# Altium PCB REO_channel.PcbDoc
Units mil, origin at the board's own origin, x right, y up, seen from the top; angles counter-clockwise.
Board outline 6000 x 4000 mil, 2 copper layers (Top Layer, Bottom Layer); 21 components, 17 nets, 94 pads, 0 vias.
Unrouted connection lines stored in the file: 23.
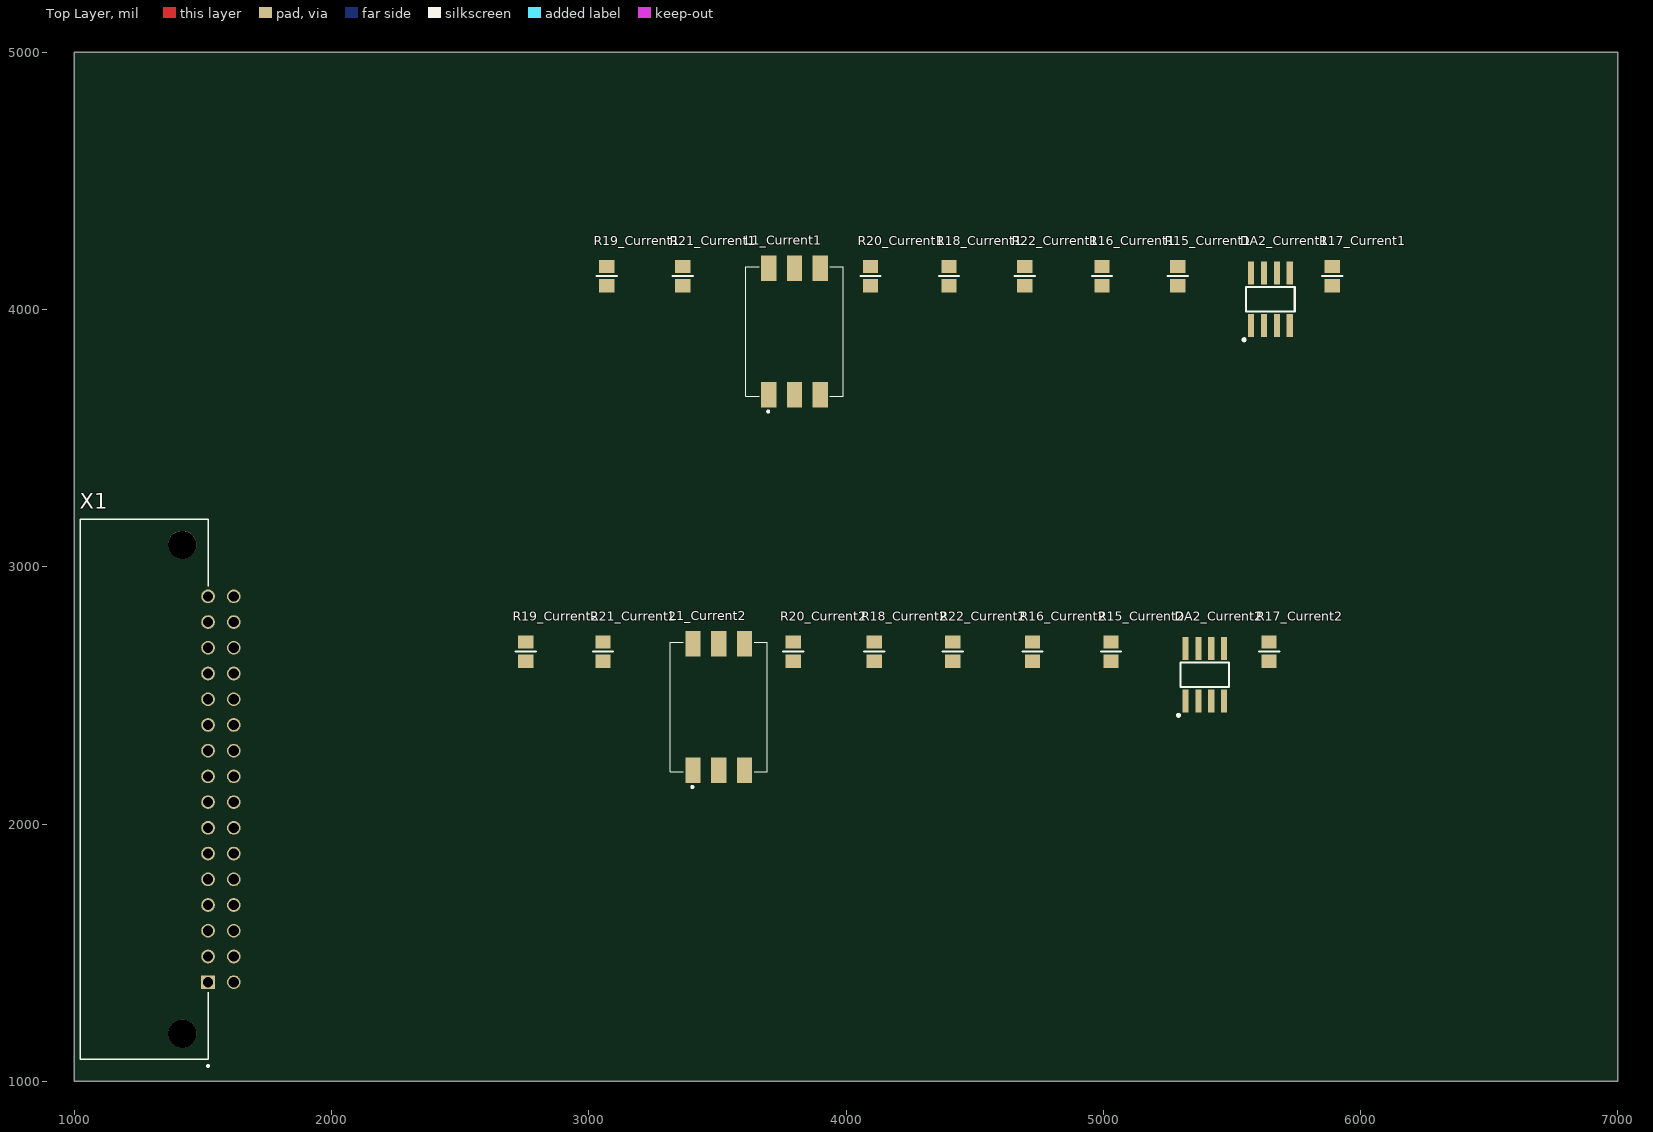
[diagram p0: Top Layer view]
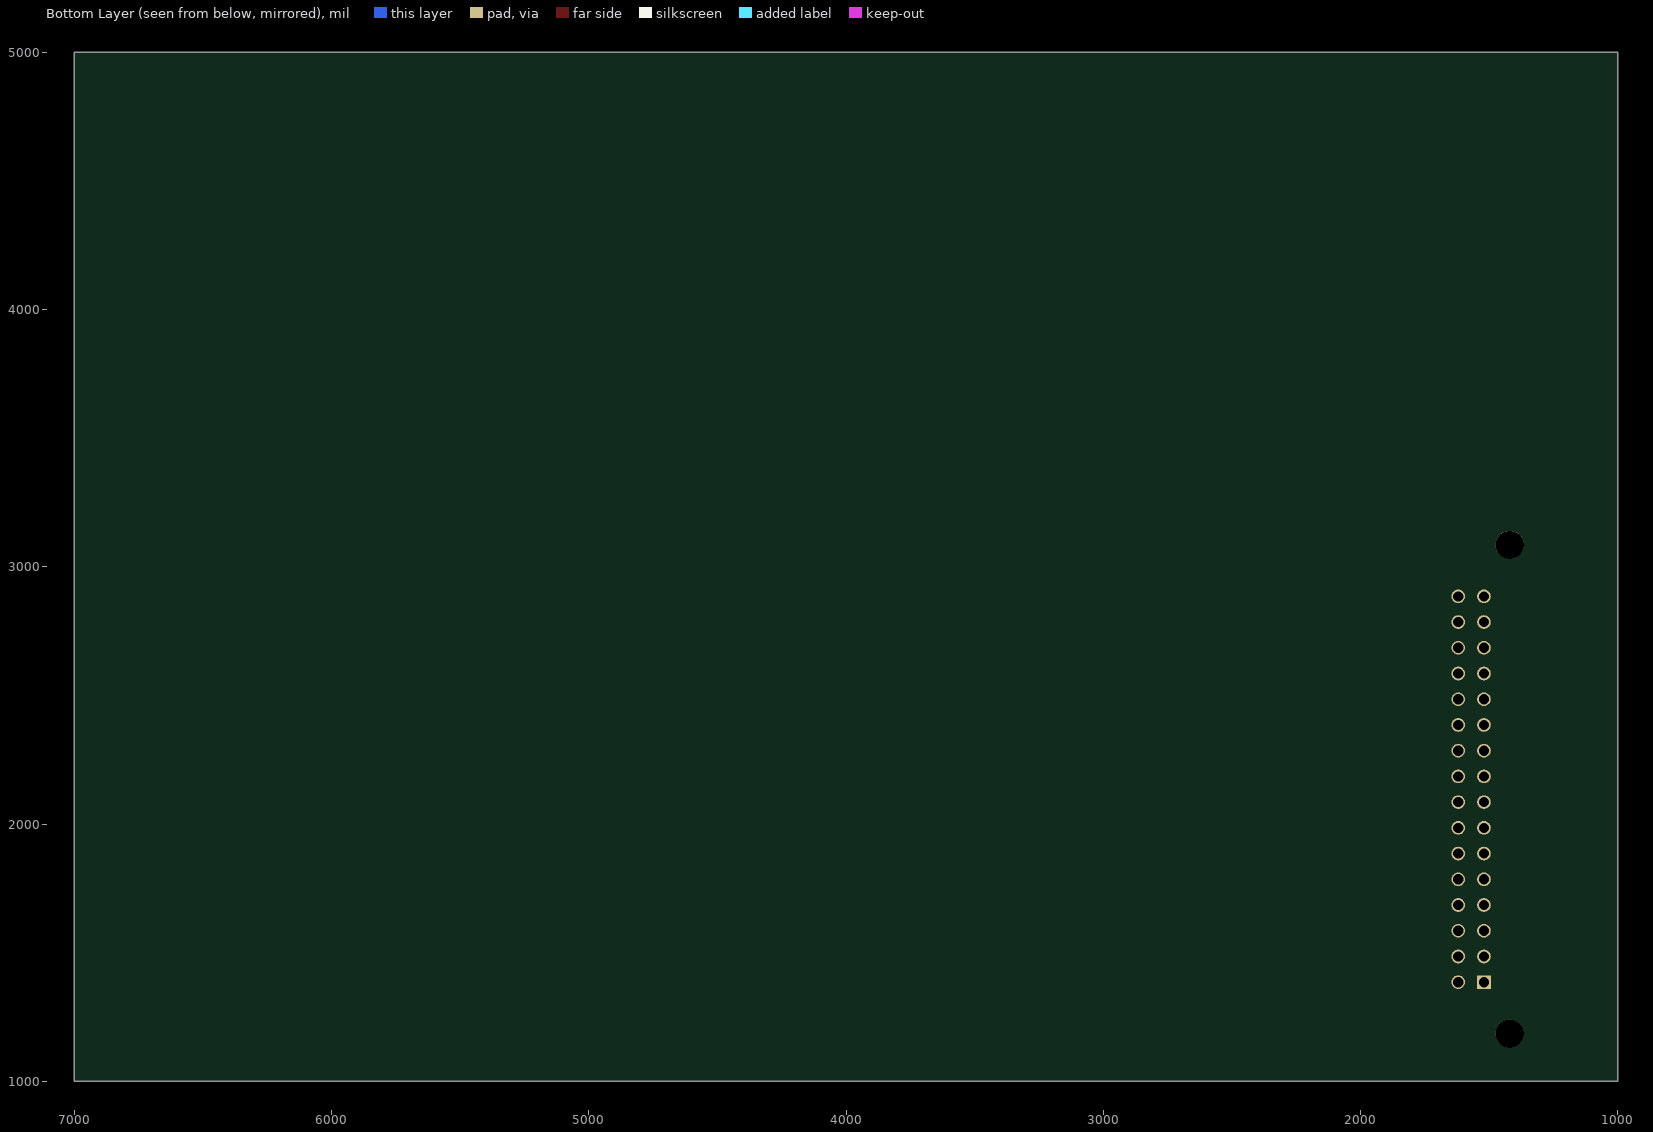
[diagram p1: Bottom Layer view, seen from below]

## Layer stack, top to bottom
Top Solder: solder mask 0.4, Solder Resist, Dk 3.5
Top Layer: signal copper 1.4
Dielectric 1: dielectric 12.6, FR-4, Dk 4.8
Bottom Layer: signal copper 1.4
Bottom Solder: solder mask 0.4, Solder Resist, Dk 3.5

## Board outline
1000,1000 7000,1000 7000,5000 1000,5000

## Design rules (kind name [scope] priority, off if disabled: settings)
Clearance [All] p1: gap=10 ignorepadtopadclearanceinfootprint=FALSE
PolygonConnect [All] p1: connectstyle=Relief reliefconductorwidth=10 reliefentries=4 polygonreliefangle="90 Angle" airgapwidth=10
RoutingVias [All] p1: holewidth=28 width=50 viastyle="Through Hole" minholewidth=28 minwidth=50 maxholewidth=28 maxwidth=50
SolderMaskExpansion [All] p1: expansion=4 istentingtop=FALSE
Width [All] p1: maxlimit=10 minlimit=10 preferedwidth=10
30 further rules are at their usual default settings.

## Classes and differential pairs
channel class Current: Current1 Current2
component class Current2: DA2_Current2 L1_Current2 R15_Current2 R16_Current2 R17_Current2 R18_Current2 R19_Current2 R20_Current2 R21_Current2 R22_Current2
component class Current1: DA2_Current1 L1_Current1 R15_Current1 R16_Current1 R17_Current1 R18_Current1 R19_Current1 R20_Current1 R21_Current1 R22_Current1
component class REO_channel: X1

## Components (designator, comment, footprint, x,y, rotation, side; value= is the part's Value field where it differs from the comment)
DA2_Current1 "AD8028" "IC: SOIC 8" 5650,4040 r90 top (schematic designator DA2)
DA2_Current2 "AD8028" "IC: SOIC 8" 5395,2580 r90 top (schematic designator DA2)
L1_Current1 "SM-LP-5001" "IND: SM-LP-5001E" 3800,3905 r90 top (schematic designator L1)
L1_Current2 "SM-LP-5001" "IND: SM-LP-5001E" 3505,2445 r90 top (schematic designator L1)
R15_Current1 "2k ±1% 0805" "RES: SMD 0805 MD IPC 782" 5290,4130 r90 top (schematic designator R15)
R15_Current2 "2k ±1% 0805" "RES: SMD 0805 MD IPC 782" 5030,2670 r90 top (schematic designator R15)
R16_Current1 "2k ±1% 0805" "RES: SMD 0805 MD IPC 782" 4995,4130 r90 top (schematic designator R16)
R16_Current2 "2k ±1% 0805" "RES: SMD 0805 MD IPC 782" 4725,2670 r90 top (schematic designator R16)
R17_Current1 "2k ±1% 0805" "RES: SMD 0805 MD IPC 782" 5890,4130 r90 top (schematic designator R17)
R17_Current2 "2k ±1% 0805" "RES: SMD 0805 MD IPC 782" 5645,2670 r90 top (schematic designator R17)
R18_Current1 "1k ±1% 0805" "RES: SMD 0805 MD IPC 782" 4400,4130 r90 top (schematic designator R18)
R18_Current2 "1k ±1% 0805" "RES: SMD 0805 MD IPC 782" 4110,2670 r90 top (schematic designator R18)
R19_Current1 "0 ±1% 0805" "RES: SMD 0805 MD IPC 782" 3070,4130 r90 top (schematic designator R19)
R19_Current2 "0 ±1% 0805" "RES: SMD 0805 MD IPC 782" 2755,2670 r90 top (schematic designator R19)
R20_Current1 "0 ±1% 0805" "RES: SMD 0805 MD IPC 782" 4095,4130 r90 top (schematic designator R20)
R20_Current2 "0 ±1% 0805" "RES: SMD 0805 MD IPC 782" 3795,2670 r90 top (schematic designator R20)
R21_Current1 "0 ±1% 0805" "RES: SMD 0805 MD IPC 782" 3365,4130 r90 top (schematic designator R21)
R21_Current2 "0 ±1% 0805" "RES: SMD 0805 MD IPC 782" 3055,2670 r90 top (schematic designator R21)
R22_Current1 "1k ±1% 0805" "RES: SMD 0805 MD IPC 782" 4695,4130 r90 top (schematic designator R22)
R22_Current2 "1k ±1% 0805" "RES: SMD 0805 MD IPC 782" 4415,2670 r90 top (schematic designator R22)
X1 "DIN32MR" "DIN 2x16 32MR" 1570,2135 r270 top

## Footprints (in the part's own frame and the unit in brackets; to place one, negate y for a bottom-side part, rotate by r counter-clockwise, add the part's x,y. Pads: shape width x height; smd on the part's side, far side on the other; paste and mask are expansions set on the pad)
"DIN 2x16 32MR" [mm]
  rect 1.35x1.35 / inner round 1.35 / far side rect 1.35x1.35 hole 1: 1(19.05,-1.27)
  round 1.35 hole 1: 2(16.51,-1.27) 3(13.97,-1.27) 4(11.43,-1.27) 5(8.89,-1.27) 6(6.35,-1.27) 7(3.81,-1.27) 8(1.27,-1.27) 9(-1.27,-1.27) 10(-3.81,-1.27) 11(-6.35,-1.27) 12(-8.89,-1.27) 13(-11.43,-1.27) 14(-13.97,-1.27) 15(-16.51,-1.27) 16(-19.05,-1.27) 17(19.05,1.27) 18(16.51,1.27) 19(13.97,1.27) 20(11.43,1.27) 21(8.89,1.27) 22(6.35,1.27) 23(3.81,1.27) 24(1.27,1.27) 25(-1.27,1.27) 26(-3.81,1.27) 27(-6.35,1.27) 28(-8.89,1.27) 29(-11.43,1.27) 30(-13.97,1.27) 31(-16.51,1.27) 32(-19.05,1.27)
  round 2.79 hole 2.79 unplated: ""(-24.13,-3.81) ""(24.13,-3.81)
  silkscreen extent -26.67,-13.89 27.42,-1.17, body extent -26.6,-13.84 26.6,1.66, height 9.6
"IC: SOIC 8" [mm]
  rect 2.25x0.6 smd: 1(-2.6,1.905) 2(-2.6,0.635) 3(-2.6,-0.635) 4(-2.6,-1.905) 5(2.6,-1.905) 6(2.6,-0.635) 7(2.6,0.635) 8(2.6,1.905)
  silkscreen extent -4.1,-2.4 1.2,2.7, body extent -3.05,-2.45 2.95,2.45, height 1.75
"IND: SM-LP-5001E" [mm]
  rect 2.5x1.5 smd: 1(-6,2.54) 2(-6,0) 3(-6,-2.54) 4(6.5,-2.54) 5(6.5,0) 6(6.5,2.54)
  silkscreen extent -7.75,-4.8 6.65,4.8, body extent -6.62,-4.55 7.38,4.8, height 7.38
"RES: SMD 0805 MD IPC 782" [mm]
  rect 1.3x1.5 smd: 1(-0.95,0) 2(0.95,0)
  silkscreen extent 0,-1 0,1, body extent -1.4,-0.62 1.4,0.63, height 0.8

## Part data
DA2_Current1 DA2_Current2: library part AD8028_part
X1: library part "DIN 2x16 32MR"
R15_Current1 R15_Current2 R16_Current1 R16_Current2 R17_Current1 R17_Current2: Code=6094352561, Name="Резистор 2k±1%  0805"
R18_Current1 R18_Current2 R22_Current1 R22_Current2: Code=6027158691, Name="Резистор RC0805FR-071KL, Yageo"
R19_Current1 R19_Current2 R20_Current1 R20_Current2 R21_Current1 R21_Current2: Code=6094342239, Name="Резистор 0R ±1% 0805"

## Nets (pads, with @x,y where several pads share a name; then routed paths per layer and width w, separated by ;. In a path a pad name is that pad's centre, name@x,y a point inside that pad or via, vN(x,y) a via of type N, cw(c..) or ccw(c..) an arc to the next point about the centre after c; other vN are vias at no path point)
GNDA: R16_Current1.2 R16_Current2.2 R19_Current1.1 R19_Current2.1
NetDA2_Current1_1: DA2_Current1.1 R17_Current1.1 R22_Current1.1
NetDA2_Current1_2: DA2_Current1.2 R15_Current1.1 R17_Current1.2
NetDA2_Current1_3: DA2_Current1.3 R16_Current1.1 R18_Current1.2
NetDA2_Current2_1: DA2_Current2.1 R17_Current2.1 R22_Current2.1
NetDA2_Current2_2: DA2_Current2.2 R15_Current2.1 R17_Current2.2
NetDA2_Current2_3: DA2_Current2.3 R16_Current2.1 R18_Current2.2
NetL1_Current1_3: L1_Current1.3 R19_Current1.2
NetL1_Current1_4: L1_Current1.4 R20_Current1.1
NetL1_Current1_6: L1_Current1.6 R21_Current1.1
NetL1_Current2_3: L1_Current2.3 R19_Current2.2
NetL1_Current2_4: L1_Current2.4 R20_Current2.1
NetL1_Current2_6: L1_Current2.6 R21_Current2.1
NetR15_Current1_2: R15_Current1.2
NetR15_Current2_2: R15_Current2.2
NetR18_Current1_1: R18_Current1.1 R22_Current1.2
NetR18_Current2_1: R18_Current2.1 R22_Current2.2
pads on no net: DA2_Current1.4 DA2_Current1.5 DA2_Current1.6 DA2_Current1.7 DA2_Current1.8 DA2_Current2.4 DA2_Current2.5 DA2_Current2.6 DA2_Current2.7 DA2_Current2.8 L1_Current1.1 L1_Current1.2 L1_Current1.5 L1_Current2.1 L1_Current2.2 L1_Current2.5 R20_Current1.2 R20_Current2.2 R21_Current1.2 R21_Current2.2 X1. X1.1 X1.2 X1.3 X1.4 X1.5 X1.6 X1.7 X1.8 X1.9 X1.10 X1.11 X1.12 X1.13 X1.14 X1.15 X1.16 X1.17 X1.18 X1.19 X1.20 X1.21 X1.22 X1.23 X1.24 X1.25 X1.26 X1.27 X1.28 X1.29 X1.30 X1.31 X1.32